# Altium PCB 20211009_EleksTube_IPS_V1.2.PcbDoc
Units mil, origin at the board's own origin, x right, y up, seen from the top; angles counter-clockwise.
Board outline 8425.2 x 1811.02 mil, 2 copper layers (Top Layer, Bottom Layer), stack 55.118 mil thick; 43 components, 45 nets, 320 pads, 81 vias.
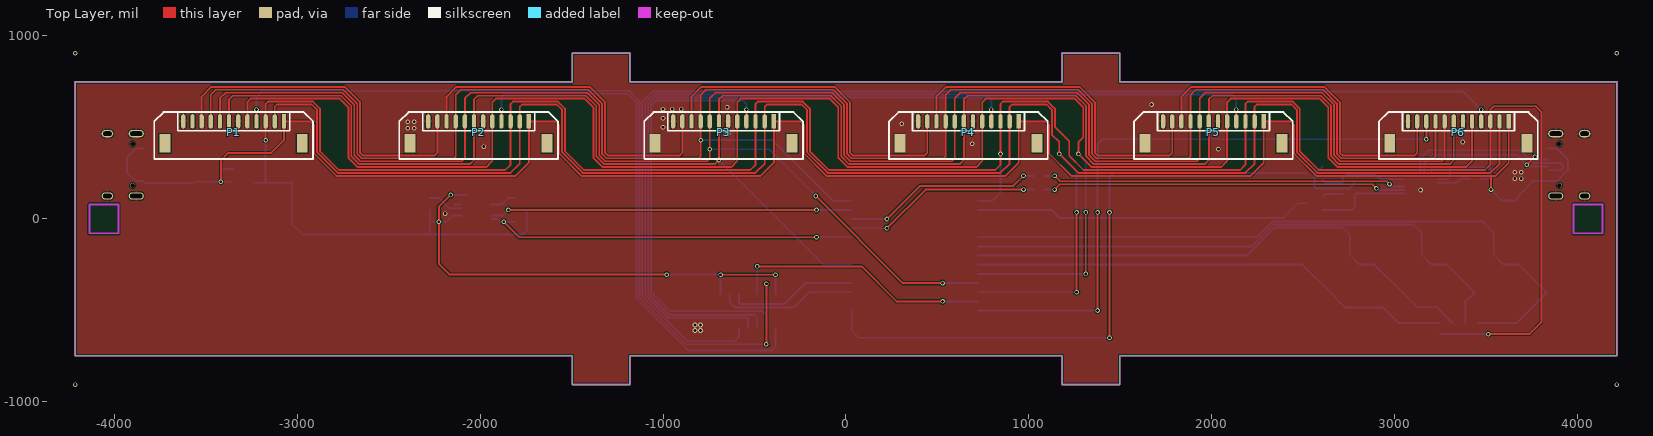
[diagram p0: Top Layer view]
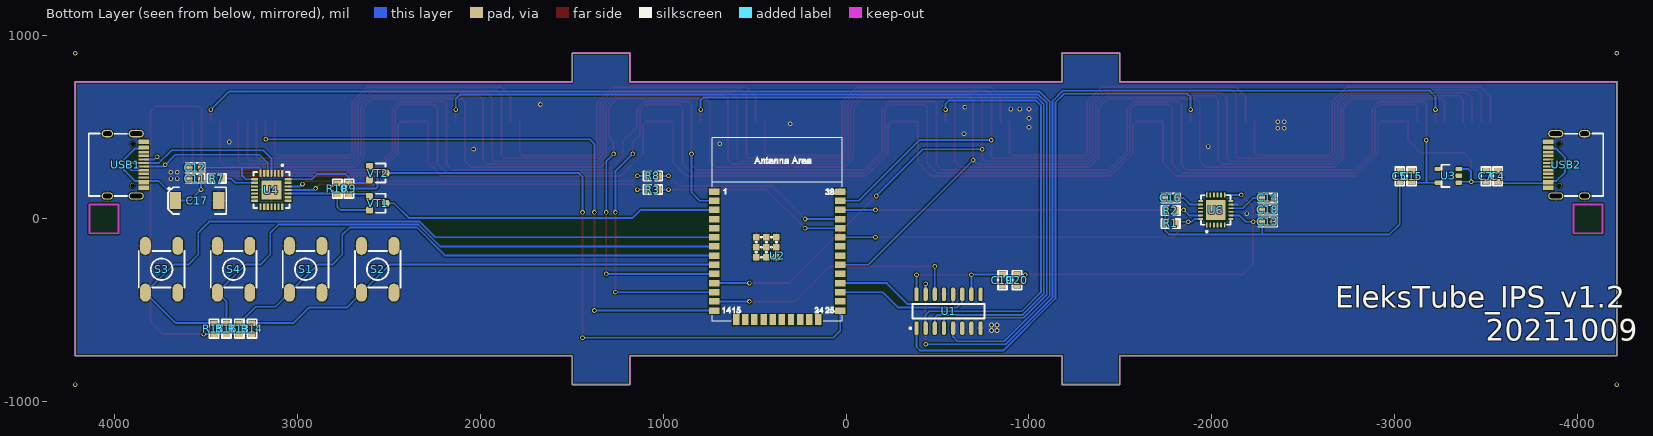
[diagram p1: Bottom Layer view, seen from below]
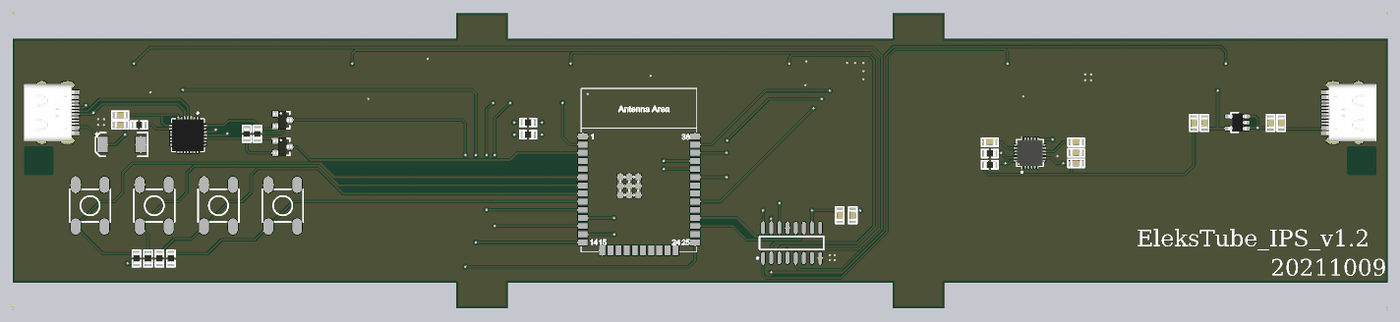
[diagram p2: 3D render of the assembled board from below, using the file's embedded part models]

## Layer stack, top to bottom
Top Layer: signal copper 3.937
Dielectric: dielectric 47.2441, FR-4, Dk 4.8
Bottom Layer: signal copper 3.937

## Board outline
-1496.06,-905.51 -1496.06,-748.03 -4212.6,-748.03 -4212.6,748.03 -1496.06,748.03 -1496.06,905.51 -1181.1,905.51 -1181.1,748.03 1181.11,748.03 1181.11,905.51 1496.07,905.51 1496.07,748.03 4212.6,748.03 4212.6,-748.03 1496.07,-748.03 1496.07,-905.51 1181.11,-905.51 1181.11,-748.03 -1181.1,-748.03 -1181.1,-905.51

## Design rules (kind name [scope] priority, off if disabled: settings)
Clearance [All] p1: gap=6
MinimumSolderMaskSliver [All] p1: minsoldermaskwidth=6
PolygonConnect PolygonConnect_1 [IsVia] p1: connectstyle=Direct reliefconductorwidth=10 reliefentries=4 polygonreliefangle="90 Angle"
PolygonConnect [All] p2: connectstyle=Relief reliefconductorwidth=10 reliefentries=4 polygonreliefangle="90 Angle"
RoutingVias [All] p1: holewidth=28 width=50 viastyle="Through Hole" minholewidth=28 minwidth=50 maxholewidth=28 maxwidth=50
SilkscreenOverComponentPads [IsPad] p1 off: minsilkscreentomaskgap=10
SolderMaskExpansion [All] p1: expansion=4
Width [All] p1: maxlimit=100 minlimit=10 preferedwidth=10 minimp=50.000000 maximp=50.000000 favimp=50.000000
26 further rules are at their usual default settings.

## Classes and differential pairs
component class Upload: C11 C12 R3 R7 R8 R9 R10 U4 VT1 VT2
component class MCU: C4 C5 C7 C13 C14 C15 C16 C17 C18 R1 R2 R13 R14 R15 R16 S1 S2 S3 S4 U2 U3 U6
component class Connector: C19 C20 P1 P2 P3 P4 P5 P6 U1 USB1 USB2

## Components (designator, comment, footprint, x,y, rotation, side; value= is the part's Value field where it differs from the comment)
C4 "0.1uF" C0603 -3561.18,202.48 r90 bottom
C5 "0.1uF" C0603 -3026.18,202.48 r90 bottom
C7 "4.7uF" C0603 -3496.18,202.48 r90 bottom
C11 "4.7uF" C0603 3525,220 r0 bottom
C12 "0.1uF" C0603 3525,280 r0 bottom
C13 "10nF" C0603 -2275,-16.06 r180 bottom
C14 "0.1uF" C0603 -2275,113.94 r180 bottom
C15 "4.7uF" C0603 -3091.18,202.48 r90 bottom
C16 "2.2nF" C0603 -1745.01,113.95 r180 bottom
C17 "47uF" 6032-C/P 3665,100 r180 bottom
C18 "0.1uF" C0603 -2335,48.94 r0 bottom
C19 "4.7uF" C0603 -855,-305 r270 bottom
C20 "0.1uF" C0603 -935,-305 r270 bottom
P1 "Header 12" SIP12-1.27 -3346.46,472.44 r180 top locked
P2 "Header 12" SIP12-1.27 -2007.87,472.44 r180 top locked
P3 "Header 12" SIP12-1.27 -669.29,472.44 r180 top locked
P4 "Header 12" SIP12-1.27 669.29,472.44 r180 top locked
P5 "Header 12" SIP12-1.27 2007.87,472.44 r180 top locked
P6 "Header 12" SIP12-1.27 3346.46,472.44 r180 top locked
R1 "10K" R0603 -1745,-25 r180 bottom
R2 "10K" R0603 -1745,45 r180 bottom
R3 "200R" R0603 1025,160 r0 bottom
R7 "10K" R0603 3470,220 r180 bottom
R8 "200R" R0603 1025,235 r0 bottom
R9 "12K" R0603 2715,195 r270 bottom
R10 "12K" R0603 2780,135 r90 bottom
R13 "10K" R0603 3315,-630 r90 bottom
R14 "10K" R0603 3245,-630 r90 bottom
R15 "10K" R0603 3455,-630 r90 bottom
R16 "10K" R0603 3385,-630 r90 bottom
S1 "SW-PB" 6*6*6 2952.76,-275.59 r90 bottom
S2 "SW-PB" 6*6*6 2559.06,-275.59 r90 bottom
S3 "SW-PB" 6*6*6 3740.16,-275.59 r90 bottom
S4 "SW-PB" 6*6*6 3346.46,-275.59 r90 bottom
U1 "74HC595" SO-16_L -560.32,-505 r90 bottom
U2 "ESP32-WROOM-32D" ESP32-WROOM-32D 435,-155 r180 bottom
U3 "SPX3819.3.3" SOT23-5 -3289.68,235 r0 bottom
U4 "CP2102" QFN-28 3140,157.48 r270 bottom
U6 "MPU6050" QFN-24 -2020.6,48.24 r90 bottom
USB1 "Type-C" Type-C-TOP 3937.01,295.28 r0 bottom locked
USB2 "Type-C" Type-C-TOP -3937.01,295.28 r180 bottom locked
VT1 "S8050" SMT_TRIODE_NPN 2560,85 r270 bottom
VT2 "S8050" SMT_TRIODE_NPN 2560,250 r270 bottom

## Footprints (in the part's own frame and the unit in brackets; to place one, negate y for a bottom-side part, rotate by r counter-clockwise, add the part's x,y. Pads: shape width x height; smd on the part's side, far side on the other; paste and mask are expansions set on the pad)
6*6*6 [mm]
  oval 2.5x1.5 smd: 1(-3.25,2.25) 2(3.25,2.25) 3(-3.25,-2.25) 4(3.25,-2.25)
  silkscreen extent -2.54,-3.17 2.54,3.17
6032-C/P [mm]
  rect 1.6x2.4 smd: 1(0,0) 2(6.02,0)
  silkscreen extent -1.04,-1.85 7.06,1.85
C0603 [mil]
  rect 30x38 smd: 1(0,0) 2(60,0)
  silkscreen extent -21,-25 81,25, body extent -3,-18 63,18, height 35
ESP32-WROOM-32D [mm]
  rect 1.5x0.9 smd: 1(-7.245,7.72) 2(-7.245,6.45) 3(-7.245,5.18) 4(-7.245,3.91) 5(-7.245,2.64) 6(-7.245,1.37) 7(-7.245,0.1) 8(-7.245,-1.17) 9(-7.245,-2.44) 10(-7.245,-3.71) 11(-7.245,-4.98) 12(-7.245,-6.25) 13(-7.245,-7.52) 14(-7.245,-8.79) 25(10.255,-8.79) 26(10.255,-7.52) 27(10.255,-6.25) 28(10.255,-4.98) 29(10.255,-3.71) 30(10.255,-2.44) 31(10.255,-1.17) 32(10.255,0.1) 33(10.255,1.37) 34(10.255,2.64) 35(10.255,3.91) 36(10.255,5.18) 37(10.255,6.45) 38(10.255,7.72)
  rect 0.9x1.5 smd: 15(-4.205,-10.04) 16(-2.935,-10.04) 17(-1.665,-10.04) 18(-0.395,-10.04) 19(0.875,-10.04) 20(2.145,-10.04) 21(3.415,-10.04) 22(4.685,-10.04) 23(5.955,-10.04) 24(7.225,-10.04)
  rect 0.9x0.9 smd: 39(-1.4,-1.4) 39(-1.4,0) 39(-1.4,1.4) 39(0,-1.4) 39(0,0) 39(0,1.4) 39(1.4,-1.4) 39(1.4,0) 39(1.4,1.4)
  silkscreen extent -7.5,-10.29 10.5,15.21
QFN-24 [mm] "QFN, 24-Leads, Body 4.1x4.1mm (max), Pitch 0.50mm, IPC Low"
  oval 0.7x0.25 smd: 1(-2.1,1.25) 2(-2.1,0.75) 3(-2.1,0.25) 4(-2.1,-0.25) 5(-2.1,-0.75) 6(-2.1,-1.25) 13(2.1,-1.25) 14(2.1,-0.75) 15(2.1,-0.25) 16(2.1,0.25) 17(2.1,0.75) 18(2.1,1.25)
  oval 0.25x0.7 smd: 7(-1.25,-2.1) 8(-0.75,-2.1) 9(-0.25,-2.1) 10(0.25,-2.1) 11(0.75,-2.1) 12(1.25,-2.1) 19(1.25,2.1) 20(0.75,2.1) 21(0.25,2.1) 22(-0.25,2.1) 23(-0.75,2.1) 24(-1.25,2.1)
  rect 2.8x2.7 smd: ""(0,0)
  silkscreen extent -3.12,-2.05 2.05,2.05, body extent -2.02,-2.02 2.02,2.02, height 0.95
QFN-28 [mil]
  rrect50% 38x12 smd mask+5: 1(-91.5,59.06) 2(-91.5,39.37) 3(-91.5,19.68) 4(-91.5,0) 5(-91.5,-19.68) 6(-91.5,-39.37) 7(-91.5,-59.06) 15(91.5,-59.06) 16(91.5,-39.37) 17(91.5,-19.68) 18(91.5,0) 19(91.5,19.68) 20(91.5,39.37) 21(91.5,59.06)
  rrect50% 12x38 smd mask+5: 8(-59.06,-91.5) 9(-39.37,-91.5) 10(-19.68,-91.5) 11(0,-91.5) 12(19.69,-91.5) 13(39.37,-91.5) 14(59.06,-91.5) 22(59.06,91.5) 23(39.37,91.5) 24(19.69,91.5) 25(0,91.5) 26(-19.68,91.5) 27(-39.37,91.5) 28(-59.06,91.5)
  rect 106.3x110.24 smd: 29(0,0)
  silkscreen extent -140,-99 99,99, body extent -99,-99 98,98, height 35
R0603 [mil]
  rect 30x38 smd: 1(0,0) 2(60,0)
  silkscreen extent -21,-25 81,25, body extent -4,-19 64,19, height 22
SIP12-1.27 [mm]
  rect 0.6x2 smd: 1(-6.985,-1.524)
  oval 0.6x2 smd: 2(-5.715,-1.524) 3(-4.445,-1.524) 4(-3.175,-1.524) 5(-1.905,-1.524) 6(-0.635,-1.524) 7(0.635,-1.524) 8(1.905,-1.524) 9(3.175,-1.524) 10(4.445,-1.524) 11(5.715,-1.524) 12(6.985,-1.524)
  rect 1.524x2.54 smd: ""(-9.525,1.524) ""(9.525,1.524)
  silkscreen extent -11.01,-2.82 11.01,3.68
SMT_TRIODE_NPN [mm] "Surface mount NPN transistor, package SOT-23"
  rrect50% 0.95x1 smd: 1(-0.95,-1.125) 2(0.95,-1.125) 3(0,1.125)
  silkscreen extent -1.33,-0.22 1.32,1.13, body extent -1.45,-1.4 1.45,1.4, height 1.3
SO-16_L [mm] "SOIC, 16-Leads, Body 9.9x3.9mm, Pitch 1.27mm, IPC High Density"
  oval 1.9x0.6 smd: 1(-2.35,4.445) 2(-2.35,3.175) 3(-2.35,1.905) 4(-2.35,0.635) 5(-2.35,-0.635) 6(-2.35,-1.905) 7(-2.35,-3.175) 8(-2.35,-4.445) 9(2.35,-4.445) 10(2.35,-3.175) 11(2.35,-1.905) 12(2.35,-0.635) 13(2.35,0.635) 14(2.35,1.905) 15(2.35,3.175) 16(2.35,4.445)
  silkscreen extent -2.47,-5 1,5.42, body extent -2,-5 2,5, height 1.75
SOT23-5 [mm] "SOT23, 3-Leads, Body 3.1x3.0mm (max), Pitch 0.95mm, IPC Medium Density"
  rrect50% 0.889x0.6 smd: 1(-1.5,0.95) 2(-1.5,0) 3(-1.5,-0.95) 4(1.396,-0.95) 5(1.396,0.95)
  silkscreen extent -0.2,-1.55 0.9,1.55, body extent -1.48,-1.45 1.32,1.45, height 1.2
Type-C-TOP [mm]
  round 0.65 hole 0.65: 0(-0.98,-2.89) 0(-0.98,2.89)
  oval 1.6x1 hole 0.6 slot 1.2 at 0 deg: 1(2.52,4.325) 2(2.52,-4.325)
  oval 2.1x1 hole 0.6 slot 1.7 at 0 deg: 3(-1.48,-4.325) 4(-1.48,4.325)
  rrect50% 1.5x0.3 smd: A1(-2.52,-3.35) A4(-2.52,-2.55) A5(-2.52,-1.25) A6(-2.52,-0.25) A7(-2.52,0.25) A8(-2.52,1.25) A9(-2.52,2.55) A12(-2.52,3.35) B1(-2.52,3.05) B4(-2.52,2.25) B5(-2.52,1.75) B6(-2.52,0.75) B7(-2.52,-0.75) B8(-2.52,-1.75) B9(-2.52,-2.25) B12(-2.52,-3.05)
  silkscreen extent -0.22,-4.33 5.12,4.33, body extent -2.57,-4.47 5.18,4.47, height 3.26

## Part data
C4 C5 C7 C11 C12 C15 C19 C20: library part Cap, "Capacitor"
C13 C14 C16 C18: library part 电容-0402, "Capacito"
C17: library part "Cap Pol1", "Polarized Capacitor (Radial)"
P1 P2 P3 P4 P5 P6: "Header, 12-Pin"
R1 R2 R13 R14 R15 R16: library part Res, "µç×"
R3 R7 R8 R9 R10: library part 电阻-0402, "Resisto"
S1 S2 S3 S4: "Switch"
U3: "LDO"
U4: "USBתTTL"
U6: "六轴传感器"
USB1 USB2: library part USB-Type-C-TOP
VT1 VT2: library part SMT_TRIODE_NPN, "Surface mount NPN transistor, package SOT-23"

## Via types
v1: diameter 25, hole 15, Top Layer to Bottom Layer, tented both sides, 81 vias

## Nets (pads, with @x,y where several pads share a name; then routed paths per layer and width w, separated by ;. In a path a pad name is that pad's centre, name@x,y a point inside that pad or via, vN(x,y) a via of type N, cw(c..) or ccw(c..) an arc to the next point about the centre after c; other vN are vias at no path point)
BLK: P1.2 P2.2 P3.2 P4.2 P5.2 P6.2 U2.12 | length 11151.8
  Top Layer w10: P1.2 -3121.46,612.87 -3109.33,625 -2919.33,625 -2890.33,596 -2890.33,363.63 -2777.7,251 -1833.33,251 -1782.87,301.46 -1782.87,612.87 -1770.75,625 -1580.75,625 -1551.75,596 -1551.75,363.63 -1439.12,251 -494.75,251 -444.29,301.46 -444.29,612.87 -432.17,625 -242.17,625 -213.17,596 -213.17,363.63 -100.54,251 843.83,251 894.29,301.46 P4.2 894.29,612.87 906.42,625 1096.42,625 1125.42,596 1125.42,460 1165,420.42 v1(1165,355) 1269,251 2182.42,251 2232.87,301.46 P5.2 2232.87,612.87 2245,625 2435,625 2464,596 2464,363.63 2576.63,251 3521,251 3571.46,301.46 P6.2 ; v1(1260,-401.06) v1(1260,35)
  Bottom Layer w10: U2.12 v1(1260,-401.06) ; v1(1165,355) 1260,260 v1(1260,35)
CP_RX: R3.1 U2.34 | length 1081.2
  Top Layer w10: v1(223.58,-51.06) 434.65,160 v1(970,160)
  Bottom Layer w10: U2.34 v1(223.58,-51.06) ; v1(970,160) R3.1
CP_TX: R8.1 U2.35 | length 1091.5
  Top Layer w10: v1(223.58,-1.06) 404.65,180 915,180 v1(970,235)
  Bottom Layer w10: U2.35 v1(223.58,-1.06) ; v1(970,235) R8.1
CS_1: P1.4 U1.15 | length 4524.9
  Top Layer w10: P1.4 v1(-3221.46,597.13) ; v1(-435.32,-685) -435,-684.68 v1(-435,-355)
  Bottom Layer w10: v1(-3221.46,597.13) -3221.46,668.54 -3190,700 -1185,700 -1129,644 -1129,-428.37 -872.37,-685 v1(-435.32,-685) ; U1.15 -435,-412.17 v1(-435,-355)
CS_2: P2.4 U1.1 | length 2959.3
  Top Layer w10: P2.4 v1(-1882.87,597.13)
  Bottom Layer w10: v1(-1882.87,597.13) -1882.87,666.13 -1865,684 -1191.63,684 -1145,637.37 -1145,-435 -860,-720 -405,-720 -385.32,-700.32 U1.1
CS_3: P3.4 U1.2 | length 2410.7
  Top Layer w10: P3.4 v1(-544.29,597.13)
  Bottom Layer w10: v1(-544.29,597.13) -544.29,628.29 -563,647 -1038,647 -1065,620 -1065,-401.86 -961.86,-505 -455,-505 -435.32,-524.68 U1.2
CS_4: P4.4 U1.3 | length 3755.5
  Top Layer w10: P4.4 v1(794.29,597.13)
  Bottom Layer w10: U1.3 -485.32,-539.68 -500.31,-524.69 -964.81,-524.69 -1081,-408.49 -1081,626.63 -1044.63,663 780,663 794.29,648.71 v1(794.29,597.13)
CS_5: P5.4 U1.4 | length 5098.3
  Top Layer w10: P5.4 v1(2132.87,597.13)
  Bottom Layer w10: U1.4 -535.32,-546.06 -540.69,-540.69 -971.43,-540.69 -1097,-415.12 -1097,633.25 -1051.25,679 2111,679 2132.87,657.13 v1(2132.87,597.13)
CS_6: P6.4 U1.5 | length 6461.8
  Top Layer w10: P6.4 v1(3471.46,597.13)
  Bottom Layer w10: U1.5 -585.32,-645.32 -609,-669 -865.75,-669 -1113,-421.75 -1113,639.88 -1057.88,695 3373.58,695 v1(3471.46,597.13)
DATA_IN: U1.14 U2.13 | length 1437.2
  Top Layer w10: v1(-485.32,-260) 85,-260 276.06,-451.06 v1(527.91,-451.06)
  Bottom Layer w10: U1.14 v1(-485.32,-260) ; v1(527.91,-451.06) U2.13
DC: P1.5 P2.5 P3.5 P4.5 P5.5 P6.5 U2.10 | length 11277
  Top Layer w10: P1.5 -3271.46,637.87 -3252.33,657 -2766.33,657 -2719.33,610 -2719.33,335 -2667.33,283 -1966.33,283 -1932.87,316.46 -1932.87,637.87 -1913.75,657 -1427.75,657 -1380.75,610 -1380.75,335 -1328.75,283 -627.75,283 -594.29,316.46 -594.29,637.87 -575.17,657 -89.17,657 -42.17,610 -42.17,335 9.83,283 710.83,283 744.29,316.46 P4.5 744.29,637.87 763.42,657 1249.42,657 1296.42,610 1296.42,445 1270,418.58 v1(1270,355) 1342,283 2049.42,283 2082.87,316.46 P5.5 2082.87,637.87 2102,657 2588,657 2635,610 2635,335 2687,283 3388,283 3421.46,316.46 P6.5 ; v1(1310,-301.06) v1(1310,35)
  Bottom Layer w10: U2.10 v1(1310,-301.06) ; v1(1270,355) 1310,315 v1(1310,35)
DTR: R9.1 U4.28 VT2.2 | length 501.6
  Bottom Layer w10: VT2.2 2621.89,195 R9.1 2715,225 2735,245 2890,245 2918.46,216.54 U4.28
EN: U2.3 VT1.3 | length 1846.8
  Bottom Layer w10: U2.3 1121.06,48.94 1165,5 2390,5 2470,85 VT1.3
GND: C4.2 C5.2 C7.2 C11.2 C12.2 C13.2 C14.2 C15.2 C16.1 C17.2 C18.1 C19.2 C20.2 P1.6 P1.12 P2.6 P2.12 P3.6 P3.12 P4.6 P4.12 P5.6 P5.12 P6.6 P6.12 S1.2 S2.2 S3.2 S4.2 U1.8 U1.13 U2.1 U2.15 U2.38 U2.39 U3.2 U4.3 U4.29 U6.1 U6.9 U6.11 U6.18 USB1.1 USB1.2 USB1.3 USB1.4 USB1.A1 USB1.A12 USB1.B1 USB1.B12 USB2.1 USB2.2 USB2.3 USB2.4 USB2.A1 USB2.A12 USB2.B1 USB2.B12 | length 33.5
  Bottom Layer w10: -2136.74,77.76 U6.11
  other v1: -825,-610 -795,-610 -825,-580 -795,-580 -2190,28.94 3140,157.48 3655,220 3690,220 3655,255 3690,255 2035,380 -1980,395 690,410 3370,420 -645,465 -2395,495 -2360,495 -1000,500 305,520 -2395,530 -2360,530 -1000,550 -1000,600 -950,600 -900,600 -650,610 1670,625
GPIO0: U2.25 VT2.3 | length 3499
  Top Layer w10: v1(1440,-650) v1(1440,35)
  Bottom Layer w10: U2.25 31.26,-611.26 70,-650 v1(1440,-650) ; v1(1440,35) 1440,230 1460,250 VT2.3
GPIO12: P6.10 U2.14 | length 3470.1
  Top Layer w10: v1(1375,-501.06) v1(1375,35) ; v1(3171.46,435) P6.10
  Bottom Layer w10: U2.14 v1(1375,-501.06) ; v1(1375,35) 1375,410 1400,435 v1(3171.46,435)
GPIO16: U1.11 U2.27 | length 756.1
  Bottom Layer w10: U1.11 -635.32,-454.68 -605,-485 -285,-485 -201.06,-401.06 U2.27
GPIO17: U1.12 U2.28 | length 710.8
  Bottom Layer w10: U1.12 -585.32,-454.68 -574.37,-465.63 -338.26,-465.63 -223.69,-351.06 U2.28
GPIO18: P1.7 P2.7 P3.7 P4.7 P5.7 P6.7 U2.30 | length 10980.9
  Top Layer w10: P1.7 -3371.46,652.87 -3351.33,673 -2759.7,673 -2703.33,616.63 -2703.33,341.63 -2660.7,299 -2055.33,299 -2032.87,321.46 -2032.87,652.87 -2012.75,673 -1421.12,673 -1364.75,616.63 -1364.75,341.63 -1322.12,299 -716.75,299 v1(-694.29,321.46) -694.29,652.87 -674.17,673 -82.54,673 -26.17,616.63 -26.17,341.63 16.46,299 621.83,299 644.29,321.46 P4.7 644.29,652.87 664.42,673 1256.04,673 1312.42,616.63 1312.42,341.63 1355.04,299 1960.42,299 1982.87,321.46 P5.7 1982.87,652.87 2003,673 2594.63,673 2651,616.63 2651,341.63 2693.63,299 3299,299 3321.46,321.46 P6.7
  Bottom Layer w10: v1(-694.29,321.46) -121.77,-251.06 U2.30
GPIO21: R1.2 U2.33 U6.24 | length 2075.6
  Top Layer w10: v1(-1870,-16.06) -1785,-101.06 v1(-161.06,-101.06)
  Bottom Layer w10: U6.24 -1905.09,-0.98 -1890,-16.06 v1(-1870,-16.06) R1.2@-1805.01,-16.06 ; v1(-161.06,-101.06) U2.33
GPIO22: R2.2 U2.36 U6.23 | length 2021.7
  Top Layer w10: v1(-1845,48.94) v1(-161.06,48.94)
  Bottom Layer w10: U6.23 -1875.23,18.71 v1(-1845,48.94) R2.2@-1805.01,48.94 ; v1(-161.06,48.94) U2.36
GPIO23: P1.9 P2.9 P3.9 P4.9 P5.9 P6.9 U2.37 | length 10995.6
  Top Layer w10: P1.9 -3471.46,677.87 -3444.33,705 -2746.45,705 -2671.33,629.88 -2671.33,354.88 -2647.45,331 -2143.33,331 -2132.87,341.46 -2132.87,677.87 -2105.75,705 -1407.87,705 -1332.75,629.88 -1332.75,354.88 -1308.87,331 -804.75,331 -794.29,341.46 v1(-794.29,430) -794.29,677.87 -767.17,705 -69.28,705 5.83,629.88 5.83,354.88 29.72,331 533.83,331 544.29,341.46 P4.9 544.29,677.87 571.42,705 1269.3,705 1344.42,629.88 1344.42,354.88 1368.3,331 1872.42,331 1882.87,341.46 P5.9 1882.87,677.87 1910,705 2607.88,705 2683,629.88 2683,354.88 2706.88,331 3211,331 3221.46,341.46 P6.9
  Bottom Layer w10: v1(-794.29,430) -400,430 -68.94,98.94 U2.37
GPIO26: P1.8 P2.8 P3.8 P4.8 P5.8 P6.8 U2.11 | length 11770.9
  Top Layer w10: P1.8 -3421.46,657.87 -3390.33,689 -2753.08,689 -2687.33,623.25 -2687.33,348.25 -2654.08,315 -2099.33,315 -2082.87,331.46 -2082.87,657.87 -2051.75,689 -1414.49,689 -1348.75,623.25 -1348.75,348.25 -1315.49,315 -760.75,315 -744.29,331.46 v1(-744.29,380) -744.29,657.87 -713.17,689 -75.91,689 -10.17,623.25 -10.17,348.25 23.09,315 577.83,315 594.29,331.46 P4.8 594.29,657.87 625.42,689 1262.67,689 1328.42,623.25 1328.42,348.25 1361.67,315 1916.42,315 1932.87,331.46 P5.8 1932.87,657.87 1964,689 2601.25,689 2667,623.25 2667,348.25 2700.25,315 3255,315 3271.46,331.46 P6.8 ; v1(-165,125) 311.06,-351.06 v1(527.91,-351.06)
  Bottom Layer w10: v1(-744.29,380) -420,380 v1(-165,125) ; v1(527.91,-351.06) U2.11
GPIO32: R13.2 S1.1 U2.8 | length 2938
  Bottom Layer w10: U2.8 2188.94,-201.06 2342.8,-47.2 2712.2,-47.2 2752.6,-87.6 2752.6,-195 2807.6,-250 2887.8,-250 S1.1 3117.8,-480 3225,-480 R13.2
GPIO33: R14.2 S2.1 U2.9 | length 2657.3
  Bottom Layer w10: U2.9@720.24,-250 2413.9,-250 2494.09,-250 S2.1 2729.09,-485 2935,-485 3020,-570 R14.2
GPIO34: R15.2 S3.1 U2.6 | length 3817.9
  Bottom Layer w10: U2.6 2243.68,-101.06 2329.55,-15.2 3480.2,-15.2 3540,-75 3540,-195 3595,-250 3675.2,-250 S3.1 3662.28,-570 R15.2
GPIO35: R16.2 S4.1 U2.7 | length 3175.4
  Bottom Layer w10: U2.7 2216.31,-151.06 2336.18,-31.2 3101.2,-31.2 3146.3,-76.3 3146.3,-195 3201.3,-250 3281.5,-250 S4.1 3385,-453.58 R16.2
NetC14_1: C14.1 U6.10 | length 194.9
  Bottom Layer w10: C14.1 -2225,113.94 -2169.14,58.08 U6.10
NetC16_2: C16.2 U6.20 | length 147.9
  Bottom Layer w10: U6.20 -1881.17,77.76 -1844.99,113.95 C16.2
NetP1_10: P1.10 P2.11 | length 1939
  Top Layer w10: P1.10 -3521.46,667.87 -3468.33,721 -2739.82,721 -2655.33,636.51 -2655.33,361.51 -2640.82,347 -2247.33,347 -2232.87,361.46 P2.11
NetP2_10: P2.10 P3.11 | length 1939
  Top Layer w10: P2.10 -2182.87,667.87 -2129.75,721 -1401.24,721 -1316.75,636.51 -1316.75,361.51 -1302.24,347 -908.75,347 -894.29,361.46 P3.11
NetP3_10: P3.10 P4.11 | length 1939
  Top Layer w10: P3.10 -844.29,667.87 -791.17,721 -62.66,721 21.83,636.51 21.83,361.51 36.34,347 429.83,347 444.29,361.46 P4.11
NetP4_10: P4.10 P5.11 | length 1939
  Top Layer w10: P4.10 494.29,667.87 547.42,721 1275.93,721 1360.42,636.51 1360.42,361.51 1374.93,347 1768.42,347 1782.87,361.46 P5.11
NetP5_10: P5.10 P6.11 | length 1939
  Top Layer w10: P5.10 1832.87,667.87 1886,721 2614.51,721 2699,636.51 2699,361.51 2713.51,347 3107,347 3121.46,361.46 P6.11
NetR3_2: R3.2 U4.25 | length 1988.6
  Top Layer w10: v1(1140,160) 1169,189 2876,189 v1(2898.76,166.24)
  Bottom Layer w10: R3.2 v1(1140,160) ; v1(2898.76,166.24) 2907.52,157.48 U4.25
NetR7_2: R7.2 U4.9 | length 188.1
  Bottom Layer w10: U4.9 3336.85,196.85 3360,220 R7.2
NetR8_2: R8.2 U4.26 | length 1987.5
  Top Layer w10: v1(1140,235) 1170,205 2955,205 v1(2970,190)
  Bottom Layer w10: R8.2 v1(1140,235) ; v1(2970,190) 2982.83,177.17 U4.26
NetR9_2: R9.2 VT1.1 | length 115.9
  Bottom Layer w10: VT1.1 2616.89,135 R9.2
NetR10_2: R10.2 VT2.1 | length 367.3
  Bottom Layer w10: VT2.1 2560,243.11 2560,175 2570,165 2750,165 R10.2
RGB_LED_OUT: P1.11
RTS: R10.1 U4.24 VT1.2 | length 518.6
  Bottom Layer w10: VT1.2 2762.6,47.6 2780,65 R10.1 ; R10.1@2782.8,137.8 U4.24
USB-PWR-DM: U4.5 USB1.A7 USB1.B7 | length 922.1
  Top Layer w10: v1(3720,295) v1(3765,340)
  Bottom Layer w10: U4.5 3159.68,304.68 3205,350 3665,350 3729.57,285.43 USB1.A7 ; v1(3765,340) 3780.2,324.8 USB1.B7
USB-PWR-DP: U4.4 USB1.A6 USB1.B6 | length 1013
  Bottom Layer w10: U4.4 3140,330 3185,375 3685,375 3754.88,305.12 USB1.A6 3904.88,305.12 3920,290 3920,280 3905.75,265.75 USB1.B6
VCC_3V3: C5.1 C13.1 C15.1 C18.2 C19.1 C20.1 P1.3 P2.3 P3.3 P4.3 P5.3 P6.3 R1.1 R2.1 R13.1 R14.1 R15.1 R16.1 U1.10 U1.16 U2.2 U3.5 U6.8 U6.13 | length 17402.6
  Top Layer w10: v1(-3171.46,430) P1.3 -3171.46,627.87 -3158.33,641 -2912.7,641 -2874.33,602.63 -2874.33,370.25 -2771.08,267 -1862.33,267 -1832.87,296.46 -1832.87,627.87 -1819.75,641 -1574.12,641 -1535.75,602.63 -1535.75,370.25 -1432.49,267 -523.75,267 -494.29,296.46 -494.29,627.87 -481.17,641 -235.54,641 -197.17,602.63 -197.17,370.25 -93.91,267 814.83,267 844.29,296.46 v1(844.29,355) P4.3 844.29,627.87 857.42,641 1103.04,641 1141.42,602.63 1141.42,503.58 1220,425 1220,345 1298,267 2153.42,267 2182.87,296.46 P5.3 2182.87,627.87 2196,641 2441.63,641 2480,602.63 2480,370.25 2583.25,267 3492,267 3521.46,296.46 P6.3 3521.46,596.46 3540,615 3770,615 3800,585 3800,-565 3735,-630 v1(3510,-630) ; v1(-2160,130.91) -2225,65.91 v1(-2225,-16.06) -2225,-245 -2165,-305 v1(-980,-305) ; v1(-685.32,-305.32) v1(-385.32,-305.32)
  Bottom Layer w10: U3.5 -3036.06,197.6 C5.1@-3026.18,207.48 ; -3171.46,199.06 v1(-3171.46,430) ; C5.1 -3026.18,-28.82 -2970,-85 -2275,-85 ; C18.2 C13.1 ; v1(-2160,130.91) U6.13 ; U6.8 -2150,18.71 -2184.77,-16.06 v1(-2225,-16.06) C13.1 ; R2.1 R1.1 -1745,-65 -1765,-85 -2275,-85 ; v1(-980,-305) C20.1 C19.1 -685.32,-305 v1(-685.32,-305.32) U1.10 ; U1.16 v1(-385.32,-305.32) ; U2.2 798.94,98.94 844.29,144.29 v1(844.29,355) ; R14.1 R13.1 R16.1 R15.1 v1(3510,-630) ; -2275,-85 C13.1
VDD_5V: C4.1 C7.1 C11.1 C12.1 C17.1 P1.1 P2.1 P3.1 P4.1 P5.1 P6.1 R7.1 U3.1 U3.3 U4.7 U4.8 USB1.A4 USB1.A9 USB1.B4 USB1.B9 USB2.A4 USB2.A9 USB2.B4 USB2.B9 | length 11996.9
  Top Layer w10: v1(-3416.18,202.48) -3416.18,318.82 -3375,360 -3140,360 -3071.46,428.54 P1.1 -2926.77,532.44 -2906.33,512 -2906.33,357 -2784.33,235 -1804.33,235 -1732.87,306.46 P2.1 -1588.19,532.44 -1567.75,512 -1567.75,357 -1445.75,235 -465.75,235 -394.29,306.46 P3.1 -249.61,532.44 -229.17,512 -229.17,357 -107.17,235 872.83,235 944.29,306.46 P4.1 1088.98,532.44 1109.42,512 1109.42,357 1231.42,235 2211.42,235 2282.87,306.46 P5.1 2427.56,532.44 2448,512 2448,357 2570,235 3550,235 3621.46,306.46 P6.1 ; v1(3525,160) 3525,232.94
  Bottom Layer w10: USB2.A4 C4.1@-3568.78,194.88 ; USB2.B9 -3881.14,206.69 -3930,255.55 -3930,335 -3881.14,383.86 USB2.B4 ; C4.1 C7.1 v1(-3416.18,202.48) ; U3.1@-3353.62,202.48 v1(-3416.18,202.48) ; U3.3 -3401.26,272.4 -3416.18,257.48 v1(-3416.18,202.48) ; U4.7 3199.06,274.06 3205,280 3300,280 ; U4.8 3281.54,216.54 3300,235 3300,280 ; R7.1 C11.1 ; USB1.B9 3886.14,383.86 3945,325 3945,265 3887.79,207.79 3887.53,207.79 3886.43,206.69 USB1.B4 3756.69,206.69 3665,115 C17.1 3585,100 v1(3525,160) C11.1 ; 3300,280 C12.1 C11.1
pads on no net: P1. P2. P3. P4. P5. P6. S1.3 S1.4 S2.3 S2.4 S3.3 S3.4 S4.3 S4.4 U1.6 U1.7 U1.9 U2.4 U2.5 U2.16 U2.17 U2.18 U2.19 U2.20 U2.21 U2.22 U2.23 U2.24 U2.26 U2.29 U2.31 U2.32 U3.4 U4.1 U4.2 U4.6 U4.10 U4.11 U4.12 U4.13 U4.14 U4.15 U4.16 U4.17 U4.18 U4.19 U4.20 U4.21 U4.22 U4.23 U4.27 U6. U6.2 U6.3 U6.4 U6.5 U6.6 U6.7 U6.12 U6.14 U6.15 U6.16 U6.17 U6.19 U6.21 U6.22 USB1.0 USB1.A5 USB1.A8 USB1.B5 USB1.B8 USB2.0 USB2.A5 USB2.A6 USB2.A7 USB2.A8 USB2.B5 USB2.B6 USB2.B7 USB2.B8
copper on no net:
  other v1: -4212.6,-905.51 4212.6,-905.51 -4212.6,905.51 4212.6,905.51

## Polygon pours and split planes (outlines as drawn)
GND on Top Layer "Top1-No Net" (solid, remove dead copper, pour order 2): -4212.6,-905.51 -4212.6,905.51 4212.6,905.51 4212.6,-905.51 -4212.6,-905.51
GND on Bottom Layer "Top1-No Net" (solid, remove dead copper, pour order 2): -4212.6,-905.51 -4212.6,905.51 4212.6,905.51 4212.6,-905.51 -4212.6,-905.51

## Keep-outs
Keep-Out Layer:
  lines w10: -4212.6,-748.03 -1496.06,-748.03 -1496.06,-905.51 -1181.1,-905.51 -1181.1,-748.03 1181.11,-748.03 1181.11,-905.51 1496.07,-905.51 1496.07,-748.03 4212.6,-748.03 4212.6,748.03 1496.07,748.03 1496.07,905.51 1181.11,905.51 1181.11,748.03 -1181.1,748.03 -1181.1,905.51 -1496.06,905.51 -1496.06,748.03 -4212.6,748.03 -4212.6,-748.03 ; -4133.86,-78.74 -3976.38,-78.74 -3976.38,78.74 -4133.86,78.74 -4133.86,-78.74 ; 3976.38,-78.74 3976.38,78.74 4133.86,78.74 4133.86,-78.74 3976.38,-78.74

## Silkscreen, mask and mechanical layers (free items; w line width, h text height)
Bottom Overlay:
  text "EleksTube_IPS_v1.2" at -2675,-525 h200
  text "20211009" at -3495,-705 h200